# Altium PCB SY8029AIC-5V-3V3-1V2.PcbDoc
Units mil, origin at the board's own origin, x right, y up, seen from the top; angles counter-clockwise.
Board outline not stored, 2 copper layers (Top Layer, Bottom Layer); 12 components, 0 nets, 30 pads, 6 vias.
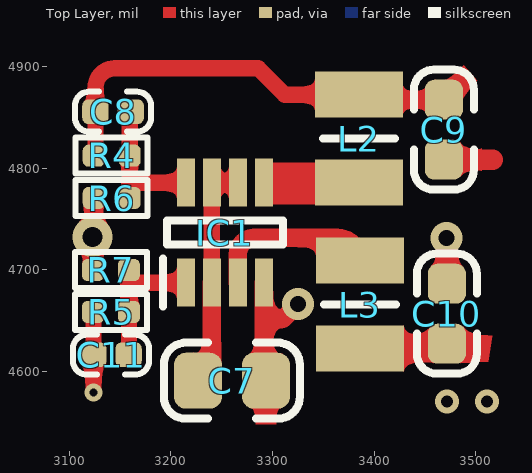
[diagram p0: Top Layer view]
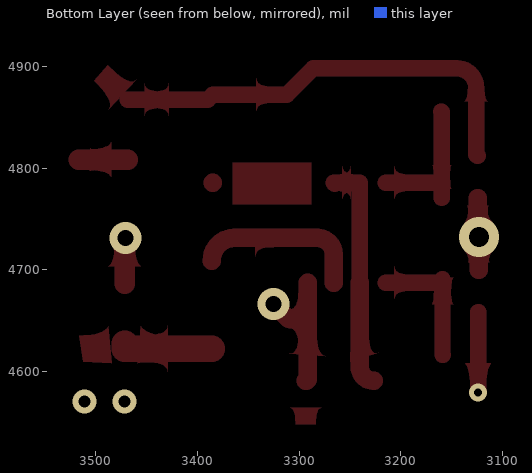
[diagram p1: Bottom Layer view, seen from below]

## Layer stack, top to bottom
Top Solder: solder mask 0.4, Solder Resist, Dk 3.5
Top Layer: signal copper 1.4
Dielectric 1: dielectric 12.6, FR-4, Dk 4.8
Bottom Layer: signal copper 1.4
Bottom Solder: solder mask 0.4, Solder Resist, Dk 3.5

## Components (designator, comment, footprint, x,y, rotation, side; value= is the part's Value field where it differs from the comment)
C7 "10uF" C_0805 3260.04,4590.75 r0 top
C8 "22pF" C_0402 3143.08,4855.53 r0 top
C9 "22uF" C_0603 3468.7,4837.8 r270 top
C10 "22uF" C_0603 3471.65,4656.69 r90 top
C11 "22pF" C_0402 3141.08,4616.36 r180 top
IC1 "SY8029AIC" SOT65P280X110-8N 3253.15,4736.42 r90 top
L2 "MLP2520H2R2ST0S1" INDC2520X100N 3385.04,4828.94 r90 top
L3 "MLP2520H2R2ST0S1" INDC2520X100N 3386.02,4665.55 r90 top
R4 "22kΩ" R_0402 3141.79,4812.22 r180 top
R5 "100kΩ" R_0402 3141.08,4658.35 r0 top
R6 "22kΩ" R_0402 3141.79,4770.54 r0 top
R7 "22kΩ" R_0402 3140.94,4699.67 r180 top

## Footprints (in the part's own frame and the unit in brackets; to place one, negate y for a bottom-side part, rotate by r counter-clockwise, add the part's x,y. Pads: shape width x height; smd on the part's side, far side on the other; paste and mask are expansions set on the pad)
C_0402 [mm] "Chip Capacitor, 2-Leads, Body 1.00x0.50mm, IPC Medium Density"
  rrect50% 0.66x0.62 smd: 1(-0.44,0) 2(0.44,0)
  silkscreen extent -0.95,-0.5 0.95,0.5, body extent -0.52,-0.27 0.53,0.28, height 0.55
C_0603 [mm] "Chip Capacitor, 2-Leads, Body 1.60x0.80mm, IPC Medium Density"
  rrect50% 1x0.95 smd: 1(-0.75,0) 2(0.75,0)
  silkscreen extent -1.5,-0.75 1.5,0.75, body extent -0.8,-0.4 0.8,0.4, height 0.87
C_0805 [mm] "Chip Capacitor, 2-Leads, Body 2.00x1.25mm, IPC Medium Density"
  rrect50% 1.2x1.4 smd: 1(-0.85,0) 2(0.85,0)
  silkscreen extent -1.7,-0.95 1.7,0.95, body extent -1,-0.62 1,0.63, height 0.88
INDC2520X100N [mm]
  rect 1.15x2.2 smd: 1(-1.1,0) 2(1.1,0)
  silkscreen extent 0,-0.9 0,0.9, body extent -1.25,-1 1.25,1, height 1
R_0402 [mm] "Chip Resistor, 2-Leads, Body 1.00x0.50mm, IPC Medium Density"
  rrect50% 0.55x0.55 smd: 1(-0.45,0) 2(0.45,0)
  silkscreen extent -0.9,-0.45 0.9,0.45, body extent -0.5,-0.27 0.5,0.28, height 0.4
SOT65P280X110-8N [mm]
  rect 1.2x0.45 smd: 1(-1.25,0.975) 2(-1.25,0.325) 3(-1.25,-0.325) 4(-1.25,-0.975) 5(1.25,-0.975) 6(1.25,-0.325) 7(1.25,0.325) 8(1.25,0.975)
  silkscreen extent -1.85,-1.45 0.3,1.55, body extent -1.4,-1.45 1.4,1.45, height 1.1

## Part data
C7 C8 C9 C10 C11: library part Cap_Chip, "贴片电容"
IC1: "Integrated Circuit", Manufacturer_Name="Silergy Corp", Manufacturer_Part_Number=SY8029AIC
L2 L3: library part MLP2520K1R0MT0S1, "Inductor", Manufacturer_Name=TDK, Manufacturer_Part_Number=MLP2520K1R0MT0S1
R4 R5 R6 R7: library part Res_Chip, "贴片电阻"

## Via types
v1: diameter 23.62, hole 11.81, Top Layer to Bottom Layer, tented both sides, 2 vias
v2: diameter 31.5, hole 15.75, Top Layer to Bottom Layer, tented both sides, 2 vias
v3: diameter 17.72, hole 7.87, Top Layer to Bottom Layer, tented both sides, 1 vias
v4: diameter 39.37, hole 19.68, Top Layer to Bottom Layer, tented both sides, 1 vias

## Nets (pads, with @x,y where several pads share a name; then routed paths per layer and width w, separated by ;. In a path a pad name is that pad's centre, name@x,y a point inside that pad or via, vN(x,y) a via of type N, cw(c..) or ccw(c..) an arc to the next point about the centre after c; other vN are vias at no path point)
pads on no net: C7.1 C7.2 C8.1 C8.2 C9.1 C9.2 C10.1 C10.2 C11.1 C11.2 IC1.1 IC1.2 IC1.3 IC1.4 IC1.5 IC1.6 IC1.7 IC1.8 L2.1 L2.2 L3.1 L3.2 R4.1 R4.2 R5.1 R5.2 R6.1 R6.2 R7.1 R7.2
copper on no net: | length 1583.2
  Top Layer w16: 3123.36,4658.35 3123.76,4658.35 3123.76,4579.35 v3(3124.08,4579.35) ; 3124.07,4812.22 ccw(c3124.07,4813.9) 3125.76,4813.9 3125.76,4855.53 3125.76,4879.03 cw(c3145.08,4879.03) 3145.08,4898.35 3286.08,4898.35 3312.19,4872.24 3385.04,4872.24 3389.96,4867.32 3468.7,4867.32 ; 3158.4,4616.36 3158.8,4616.36 3158.8,4690.83 ; 3158.66,4688.84 ccw(c3160.3,4688.84) 3160.3,4687.2 3214.76,4687.2 ; 3159.51,4770.54 3159.51,4791.38 ; 3160.4,4855.53 ccw(c3160.4,4854.63) 3159.51,4854.63 3159.51,4812.22 3159.51,4791.38 ; 3214.76,4785.63 3165.26,4785.63 cw(c3165.26,4791.38) 3159.51,4791.38 ; 3240.35,4687.2 3240.35,4785.63 3265.94,4785.63 ccw(c3265.94,4784.65) 3264.96,4784.65
  Top Layer w18: 3123.23,4699.67 3123.23,4732.2 v4(3123.08,4732.35) 3124.07,4733.35 3124.07,4770.54 ; 3226.57,4590.75 ccw(c3226.57,4604.53) 3240.35,4604.53 3240.35,4687.2 ; 3265.94,4687.2 3265.94,4715.22 cw(c3282.08,4715.22) 3282.08,4731.35 3363.53,4731.35 cw(c3363.53,4708.86) 3386.02,4708.86 ; 3291.53,4687.2 3291.53,4651.62 ; 3293.5,4590.75 cw(c3293.5,4592.72) 3291.53,4592.72 3291.53,4651.62 ; v2(3325.08,4666.35) 3310.34,4651.62 3291.53,4651.62
  Top Layer w20: 3468.7,4808.27 3516.99,4808.27 3517.08,4808.35 ; v2(3471.08,4731.35) 3471.65,4730.78 3471.65,4686.22
  Top Layer w26: 3386.02,4622.24 3471.65,4622.24 3471.65,4627.17
  other v1: 3471.65,4570.08 3511.02,4570.08

## Other copper
Top Layer:
  region: 3288.08,4764.35 3365.08,4764.35 3365.08,4805.35 3288.25,4805.35 ccw(c3291.07,4804.36) 3288.08,4804.35